# Altium PCB ch340.PcbDoc
Units mil, origin at the board's own origin, x right, y up, seen from the top; angles counter-clockwise.
Board outline 790.03 x 1555.03 mil, 2 copper layers (Top Layer, Bottom Layer); 8 components, 9 nets, 30 pads, 6 vias.
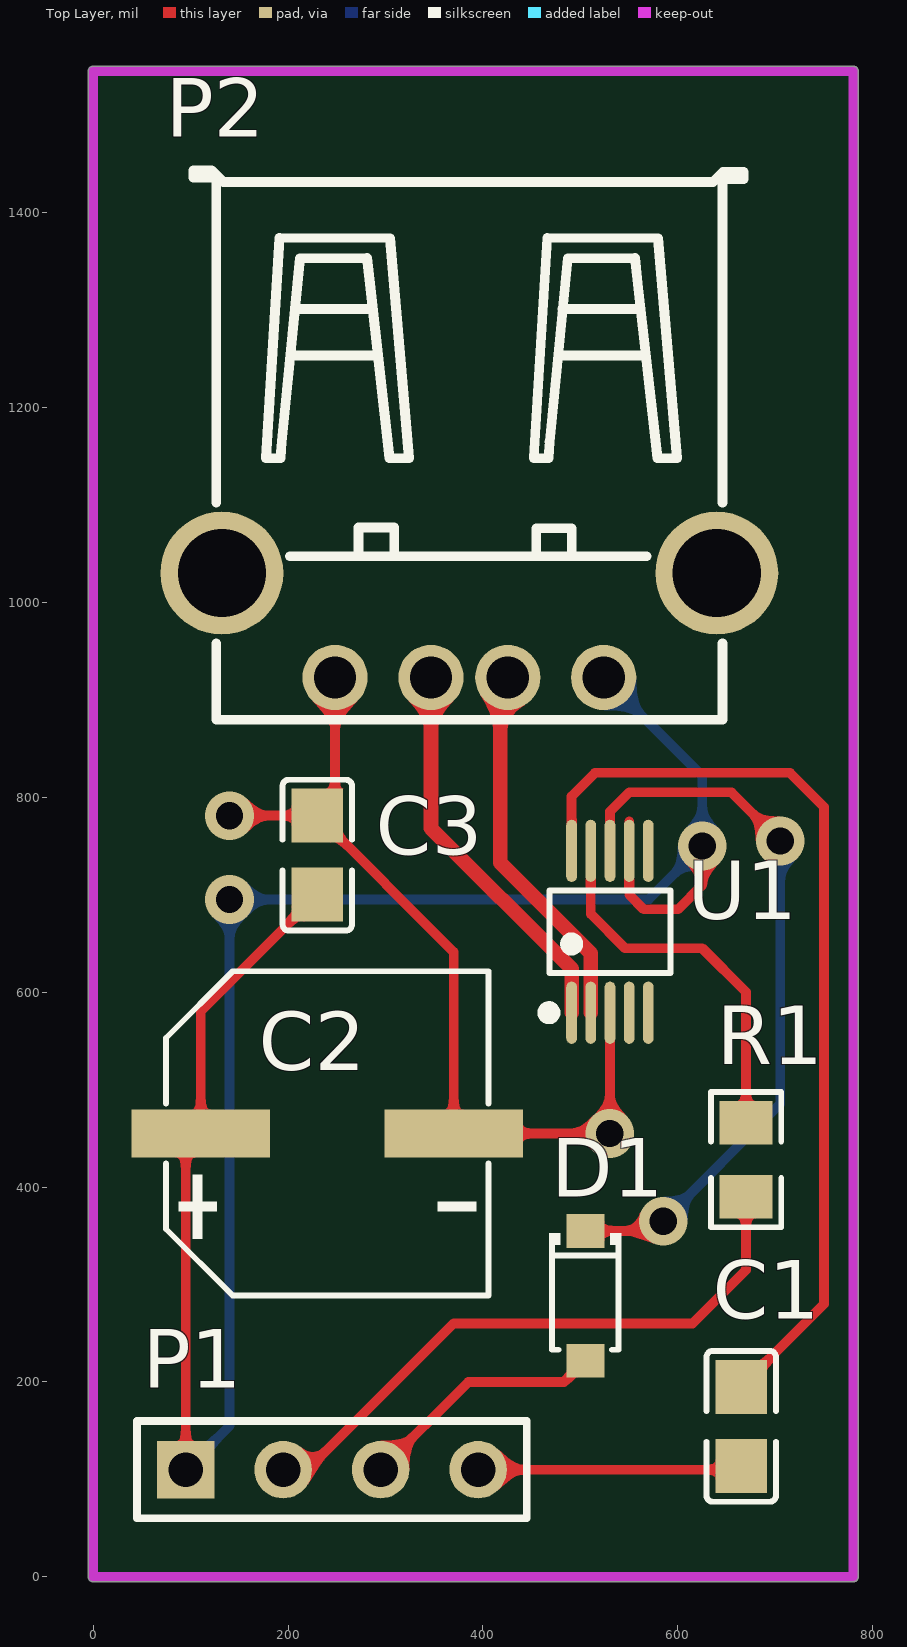
[diagram p0: Top Layer view]
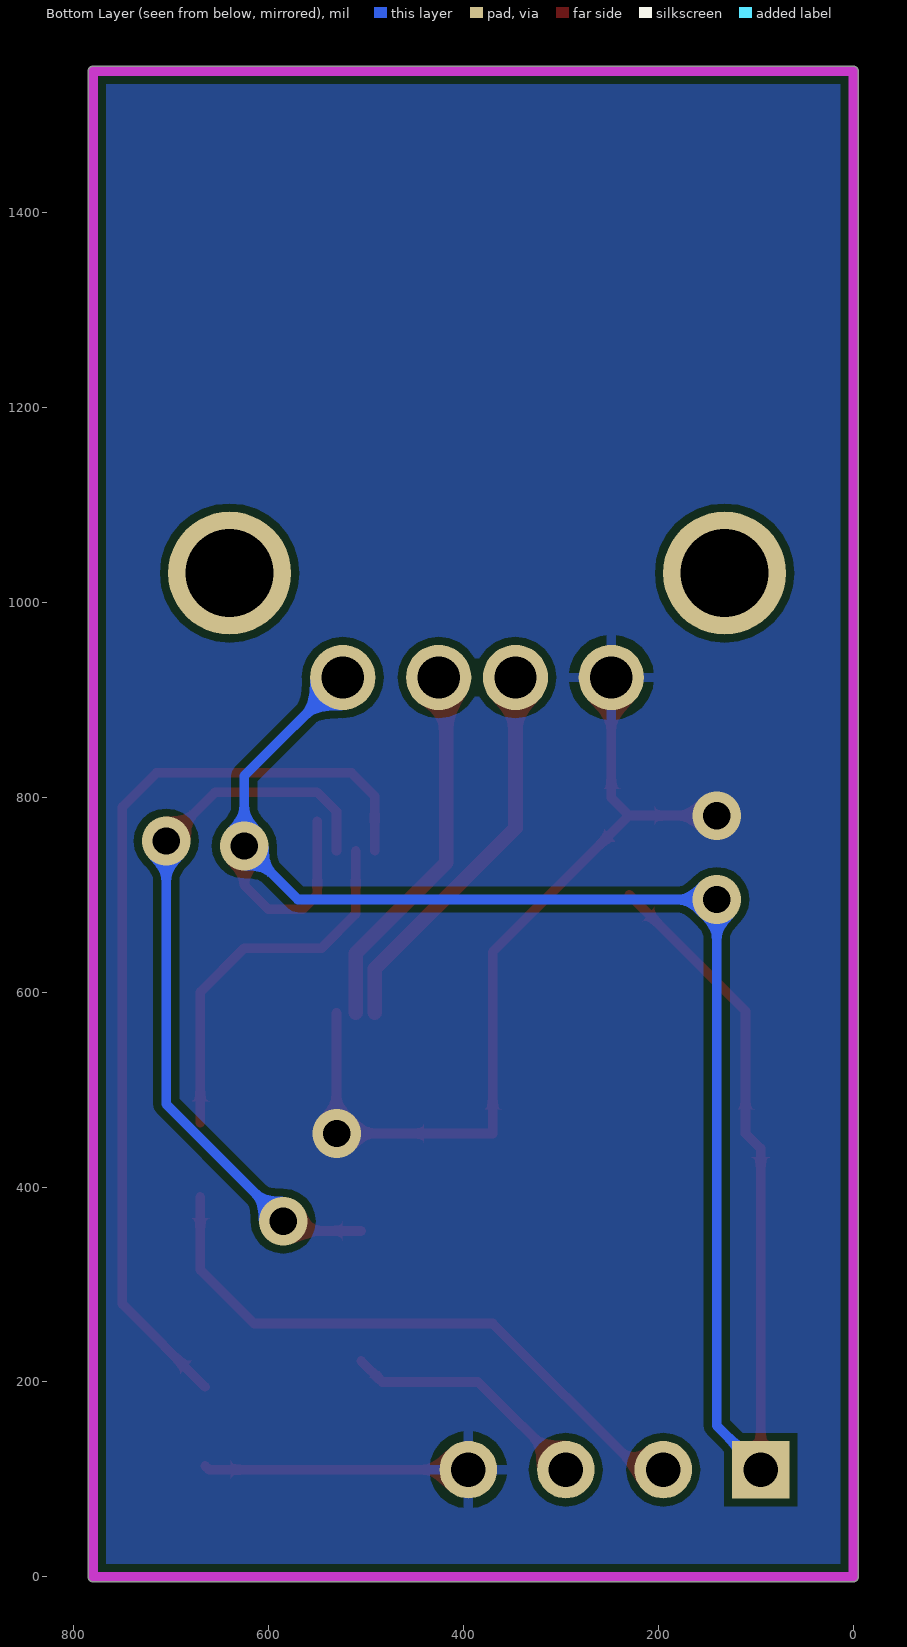
[diagram p1: Bottom Layer view, seen from below]

## Layer stack, top to bottom
Top Solder: solder mask 0.4, Solder Resist, Dk 3.5
Top Layer: signal copper 1.4
Dielectric 1: dielectric 12.6, FR-4, Dk 4.8
Bottom Layer: signal copper 1.4
Bottom Solder: solder mask 0.4, Solder Resist, Dk 3.5

## Board outline
-5.02,0 ccw(c0,0) 0,-5.01 780,-5.01 ccw(c780,0) 785.02,0 785.02,1545 ccw(c780,1545) 780,1550.01 0,1550.01 ccw(c0,1545) -5.02,1545

## Design rules (kind name [scope] priority, off if disabled: settings)
Clearance [All] p1: gap=8 ignorepadtopadclearanceinfootprint=FALSE except(0: Arc-Hole Track-Hole SMDPad-Hole THPad-Hole Via-Hole Fill-Hole Poly-Hole Region-Hole Text-Hole)
ComponentClearance [All] p1: gap=0 collisioncheckmode=3 verticalgap=0 showdistances=FALSE
DiffPairsRouting [All] p1: maxlimit=10 minlimit=10 mostfreqgap=10 toplayer_minwidth=15 toplayer_maxwidth=15 toplayer_prefwidth=15 bottomlayer_minwidth=15 bottomlayer_maxwidth=15 bottomlayer_prefwidth=15 maxuncoupledlength=500
HoleToHoleClearance [All] p1: gap=0 allowstackedmicrovias=TRUE
MinimumSolderMaskSliver [All] p1: minsoldermaskwidth=0
NetAntennae [All] p1: netantennaetolerance=2
PlaneClearance [All] p1: clearance=10
PolygonConnect [All] p1: thpad.connectstyle=Relief thpad.reliefconductorwidth=10 thpad.reliefentries=4 thpad.polygonreliefangle="90 Angle" thpad.airgapwidth=10 smdpad.connectstyle=Direct smdpad.reliefconductorwidth=10 smdpad.reliefentries=4 smdpad.polygonreliefangle="90 Angle" smdpad.airgapwidth=10 via.connectstyle=Direct via.reliefconductorwidth=10 via.reliefentries=4 via.polygonreliefangle="90 Angle" via.airgapwidth=10
RoutingVias [All] p1: holewidth=12 width=25 viastyle="Through Hole" minholewidth=10 minwidth=20 maxholewidth=15 maxwidth=30
SilkToSilkClearance [All] p1: silktosilkclearance=0
SilkToSolderMaskClearance [IsPad] p1: minsilkscreentomaskgap=0 clearancetoexposedcopper=TRUE
SolderMaskExpansion [All] p1: expansion=4
UnRoutedNet [All] p1: checkbadconnections=TRUE
Width [All] p1: maxlimit=10 minlimit=10 preferedwidth=10
21 further rules are at their usual default settings.

## Classes and differential pairs
differential pair class "New Class": D_UD
differential pair D_UD: +UD+ -UD-

## Components (designator, comment, footprint, x,y, rotation, side; value= is the part's Value field where it differs from the comment)
C1 "0.1u" 0805_C 665,195 r270 top
C2 "10u" SMD8x10.2 110.55,455 r180 top
C3 "0.1u" 0805_C 230,781.1 r270 top
D1 "B0520" B0520 505,355 r270 top
P1 "Header 4" HDR1X4 95,110 r0 top
P2 "USB2_0" USB2_0 523.86,922.9 r180 top
R1 "300" 0805_R 670,466.08 r270 top
U1 "ch340e" CH340E 490.94,578.86 r0 top

## Footprints (in the part's own frame and the unit in brackets; to place one, negate y for a bottom-side part, rotate by r counter-clockwise, add the part's x,y. Pads: shape width x height; smd on the part's side, far side on the other; paste and mask are expansions set on the pad)
0805_C [mm]
  rect 1.41x1.35 smd: 1(0,0) 2(2.06,0)
  silkscreen extent -0.93,-0.9 2.99,0.9
0805_R [mil]
  rect 44.59x54.21 smd: 1(0,0) 2(76.08,0)
  silkscreen extent -31,-36 107,36
B0520 [mm]
  rect 0.88x0.99 smd: 1(0,0) 2(3.385,0)
  silkscreen extent 0.06,-0.94 3.1,0.94
CH340E [mm]
  oval 0.28x1.62 smd: 1(0,0) 2(0.5,0) 3(1,0) 4(1.5,0) 5(2,0) 6(2,4.22) 7(1.5,4.22) 8(1,4.22) 9(0.5,4.22) 10(0,4.22)
  silkscreen extent -0.74,-0.15 2.58,3.18
HDR1X4 [mm] "Connector; Header; 4 Position"
  rect 1.5x1.5 hole 0.9: 1(0,0)
  round 1.5 hole 0.9: 2(2.54,0) 3(5.08,0) 4(7.62,0)
  silkscreen extent -1.27,-1.27 8.89,1.27
SMD8x10.2 [mm]
  rect 3.61x1.26 smd: 1(0,0) 2(-6.59,0)
  silkscreen extent -7.5,-4.23 0.91,4.23
USB2_0 [mm]
  round 1.7 hole 1.1: 1(0,0) 2(2.499,0) 3(4.501,0) 4(7,0)
  round 3.2 hole 2.3: 5(-2.95,-2.72) 5(9.95,-2.72)
  silkscreen extent -3.65,-13.22 10.69,1.1

## Part data
C1 C3: library part 0805_C0.1uf
C2: library part SMD8x10.2
P1: "Header, 4-Pin", LatestRevisionDate=17-Jul-2002, LatestRevisionNote="Re-released for DXP Platform.", Publisher="Altium Limited"
R1: library part 0805_R300
U1: library part ch340

## Via types
v1: diameter 50, hole 28, Top Layer to Bottom Layer, 6 vias

## Nets (pads, with @x,y where several pads share a name; then routed paths per layer and width w, separated by ;. In a path a pad name is that pad's centre, name@x,y a point inside that pad or via, vN(x,y) a via of type N, cw(c..) or ccw(c..) an arc to the next point about the centre after c; other vN are vias at no path point)
GND: C1.2 C2.2 C3.1 P1.4 P2.4 U1.3 | length 1179.1
  Top Layer w10: v1(140,781.1) C3.1 ; P2.4 248.26,799.36 C3.1 ; P1.4 661.1,110 C1.2 ; U1.3 530.31,455.32 v1(530,455) C2.2 370,641.1 C3.1
NetC1_1: C1.1 U1.10 | length 969.7
  Top Layer w10: U1.10 490.94,800.95 515,825 715,825 750,790 750,280 C1.1
NetD1_1: D1.1 U1.8 | length 753.6
  Top Layer w10: D1.1 v1@575,355 ; U1.8 530.31,785.32 550,805 655,805 v1(705,755)
  Bottom Layer w10: v1(585,365) 705,485 v1(705,755)
NetD1_2: D1.2 P1.3 | length 256.3
  Top Layer w10: P1.3 385,200 483.27,200 D1.2
NetP1_2: P1.2 R1.2 | length 634.9
  Top Layer w10: P1.2 220,110 370,260 615,260 670,315 R1.2
NetR1_1: R1.1 U1.9 | length 391.4
  Top Layer w10: U1.9 510.63,680 545.63,645 625,645 670,600 R1.1
UD+: P2.3 U1.1 | length 403.8
  Top Layer w15: P2.3 346.66,768.34 490.94,624.05 U1.1
UD-: P2.2 U1.2 | length 385.8
  Top Layer w15: P2.2 417.68,915.11 417.68,732.68 510.63,639.73 U1.2
VCC_+5: C2.1 C3.2 P1.1 P2.1 U1.7 | length 2179
  Top Layer w10: P1.1 95,439.45 C2.1 110.55,580.55 C3.2 ; U1.7@550,775.32 U1.7 550,700 565,685 600,685 625,710 v1(625,750)
  Bottom Layer w10: P1.1 140,155 v1(140,695) 570,695 v1(625,750) 625,821.76 P2.1
pads on no net: P2.5 U1.4 U1.5 U1.6

## Polygon pours and split planes (outlines as drawn)
GND on Bottom Layer (solid, pour order 4): 780,1545 780,0 0,0 0,1545

## Keep-outs
Keep-Out Layer:
  lines w10: 0,0 0,1545 780,1545 780,0 0,0

## Silkscreen, mask and mechanical layers (free items; w line width, h text height)
Mechanical 1:
  lines w10: 0,0 690,0 735,0 780,0 780,1545 0,1545 0,0